# Altium PCB FPC-SMD_64P-P0.50_8.15A0.064200.pcbdoc
Units mm, origin at the board's own origin, x right, y up, seen from the top; angles counter-clockwise.
Board outline 50.8 x 18.56 mm, 2 copper layers (Top Layer, Bottom Layer); 1 components, 0 nets, 66 pads, 0 vias.
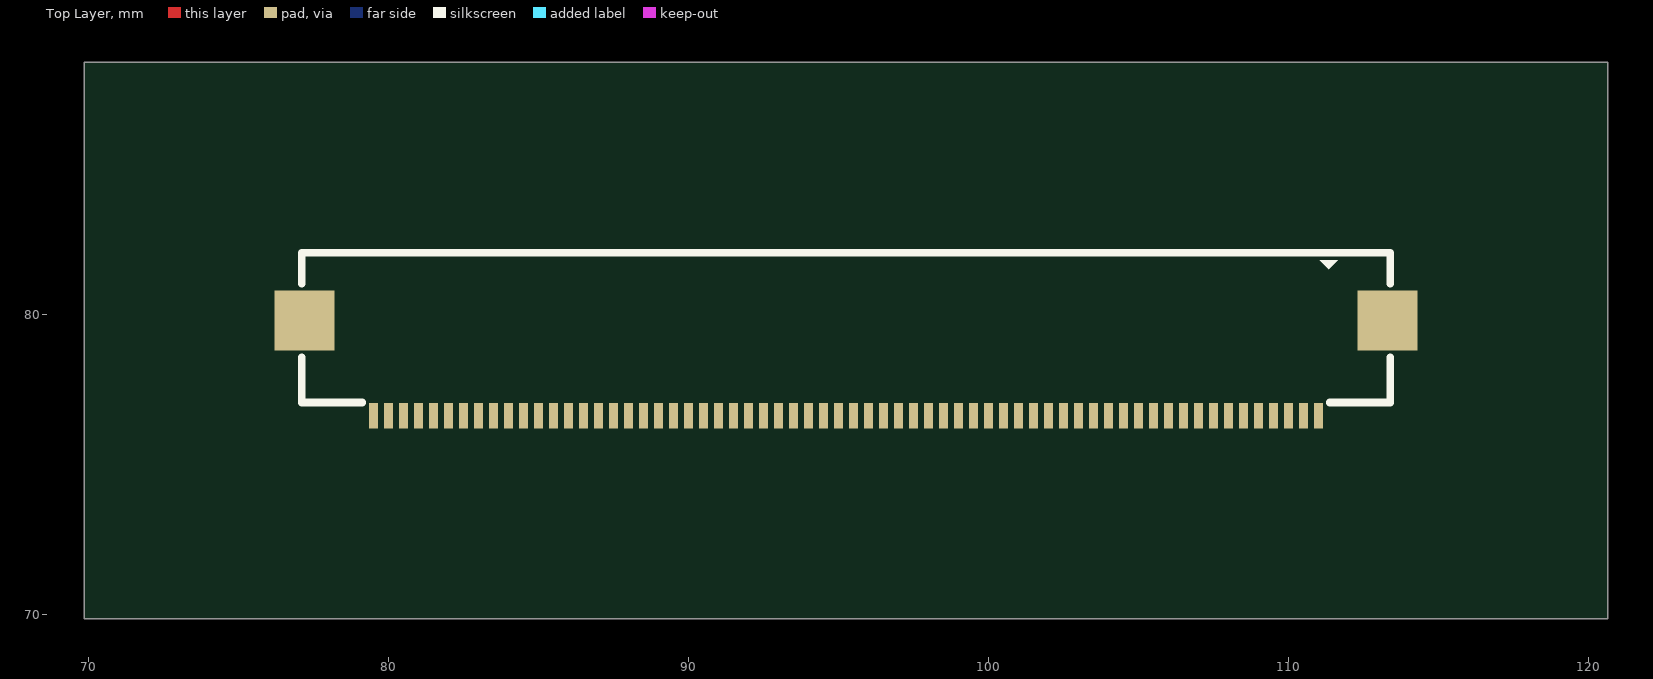
[diagram p0: Top Layer view]
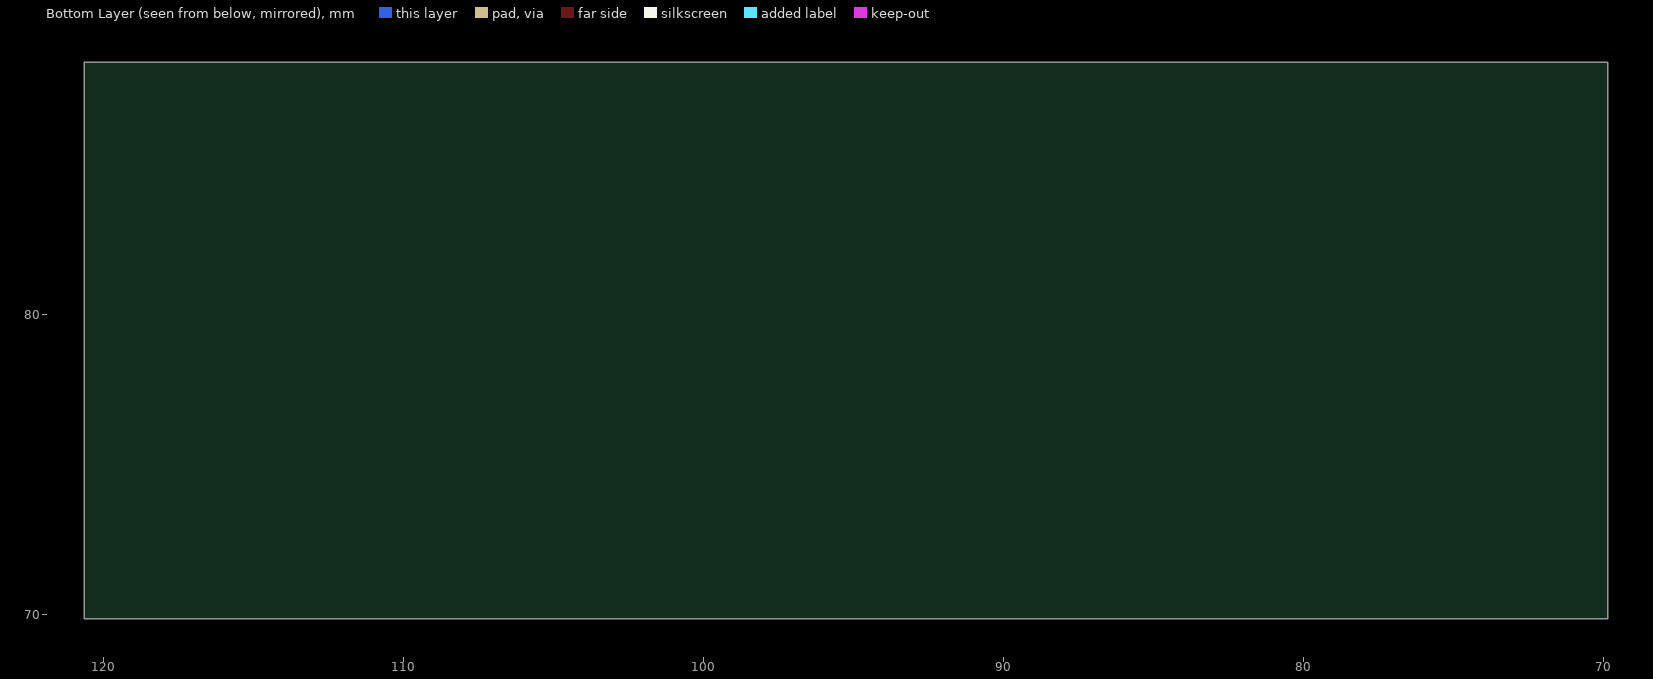
[diagram p1: Bottom Layer view, seen from below]

## Layer stack, top to bottom
Top Layer: signal copper (thickness not stored)
Dielectric: dielectric 0.32, FR-4, Dk 4.8
Bottom Layer: signal copper (thickness not stored)

## Board outline
120.65,69.85 69.85,69.85 69.85,88.412 120.65,88.412

## Components (designator, comment, footprint, x,y, rotation, side; value= is the part's Value field where it differs from the comment)
? "FPC-SMD_64P-P0.50_8.15A0.064200" FPC-SMD_64P-P0.50_8.15A0.064200 95.25,78.212 r0 top

## Footprints (in the part's own frame and the unit in brackets; to place one, negate y for a bottom-side part, rotate by r counter-clockwise, add the part's x,y. Pads: shape width x height; smd on the part's side, far side on the other; paste and mask are expansions set on the pad)
FPC-SMD_64P-P0.50_8.15A0.064200 [mm]
  rect 0.3x0.85 smd: 1(15.748,-1.587) 2(15.248,-1.587) 3(14.748,-1.587) 4(14.248,-1.587) 5(13.748,-1.587) 6(13.248,-1.587) 7(12.748,-1.587) 8(12.248,-1.587) 9(11.748,-1.587) 10(11.248,-1.587) 11(10.748,-1.587) 12(10.248,-1.587) 13(9.748,-1.587) 14(9.248,-1.587) 15(8.748,-1.587) 16(8.248,-1.587) 17(7.748,-1.587) 18(7.248,-1.587) 19(6.748,-1.587) 20(6.248,-1.587) 21(5.748,-1.587) 22(5.248,-1.587) 23(4.748,-1.587) 24(4.248,-1.587) 25(3.748,-1.587) 26(3.248,-1.587) 27(2.748,-1.587) 28(2.248,-1.587) 29(1.748,-1.587) 30(1.248,-1.587) 31(0.748,-1.587) 32(0.248,-1.587) 33(-0.252,-1.587) 34(-0.752,-1.587) 35(-1.252,-1.587) 36(-1.752,-1.587) 37(-2.252,-1.587) 38(-2.752,-1.587) 39(-3.252,-1.587) 40(-3.752,-1.587) 41(-4.252,-1.587) 42(-4.752,-1.587) 43(-5.252,-1.587) 44(-5.752,-1.587) 45(-6.252,-1.587) 46(-6.752,-1.587) 47(-7.252,-1.587) 48(-7.752,-1.587) 49(-8.252,-1.587) 50(-8.752,-1.587) 51(-9.252,-1.587) 52(-9.752,-1.587) 53(-10.252,-1.587) 54(-10.752,-1.587) 55(-11.252,-1.587) 56(-11.752,-1.587) 57(-12.252,-1.587) 58(-12.752,-1.587) 59(-13.252,-1.587) 60(-13.752,-1.587) 61(-14.252,-1.587) 62(-14.752,-1.587) 63(-15.252,-1.587) 64(-15.752,-1.587)
  rect 2x2 smd: 65(18.05,1.587) 66(-18.05,1.587)
  silkscreen extent -18.15,-1.15 18.15,3.85

## Nets (pads, with @x,y where several pads share a name; then routed paths per layer and width w, separated by ;. In a path a pad name is that pad's centre, name@x,y a point inside that pad or via, vN(x,y) a via of type N, cw(c..) or ccw(c..) an arc to the next point about the centre after c; other vN are vias at no path point)
pads on no net: ?.1 ?.2 ?.3 ?.4 ?.5 ?.6 ?.7 ?.8 ?.9 ?.10 ?.11 ?.12 ?.13 ?.14 ?.15 ?.16 ?.17 ?.18 ?.19 ?.20 ?.21 ?.22 ?.23 ?.24 ?.25 ?.26 ?.27 ?.28 ?.29 ?.30 ?.31 ?.32 ?.33 ?.34 ?.35 ?.36 ?.37 ?.38 ?.39 ?.40 ?.41 ?.42 ?.43 ?.44 ?.45 ?.46 ?.47 ?.48 ?.49 ?.50 ?.51 ?.52 ?.53 ?.54 ?.55 ?.56 ?.57 ?.58 ?.59 ?.60 ?.61 ?.62 ?.63 ?.64 ?.65 ?.66